# Altium PCB ART23275-9 REV-A.PcbDoc
Units mm, origin at the board's own origin, x right, y up, seen from the top; angles counter-clockwise.
Board outline 26 x 26 mm, 2 copper layers (Top Layer, Bottom Layer); 45 components, 27 nets, 103 pads, 33 vias.
Unrouted connection lines stored in the file: 1.
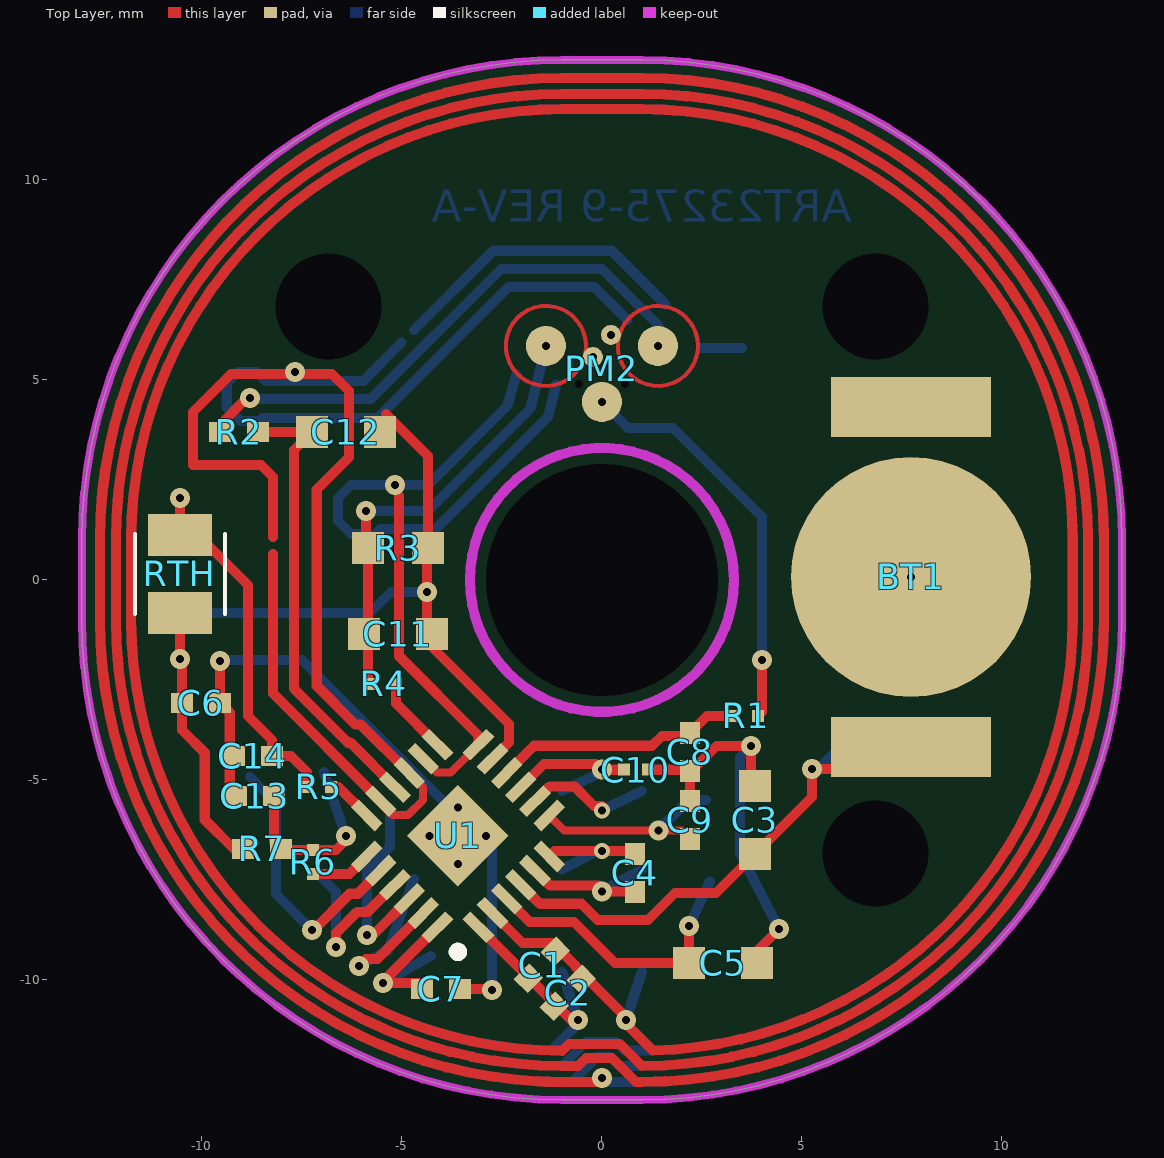
[diagram p0: Top Layer view]
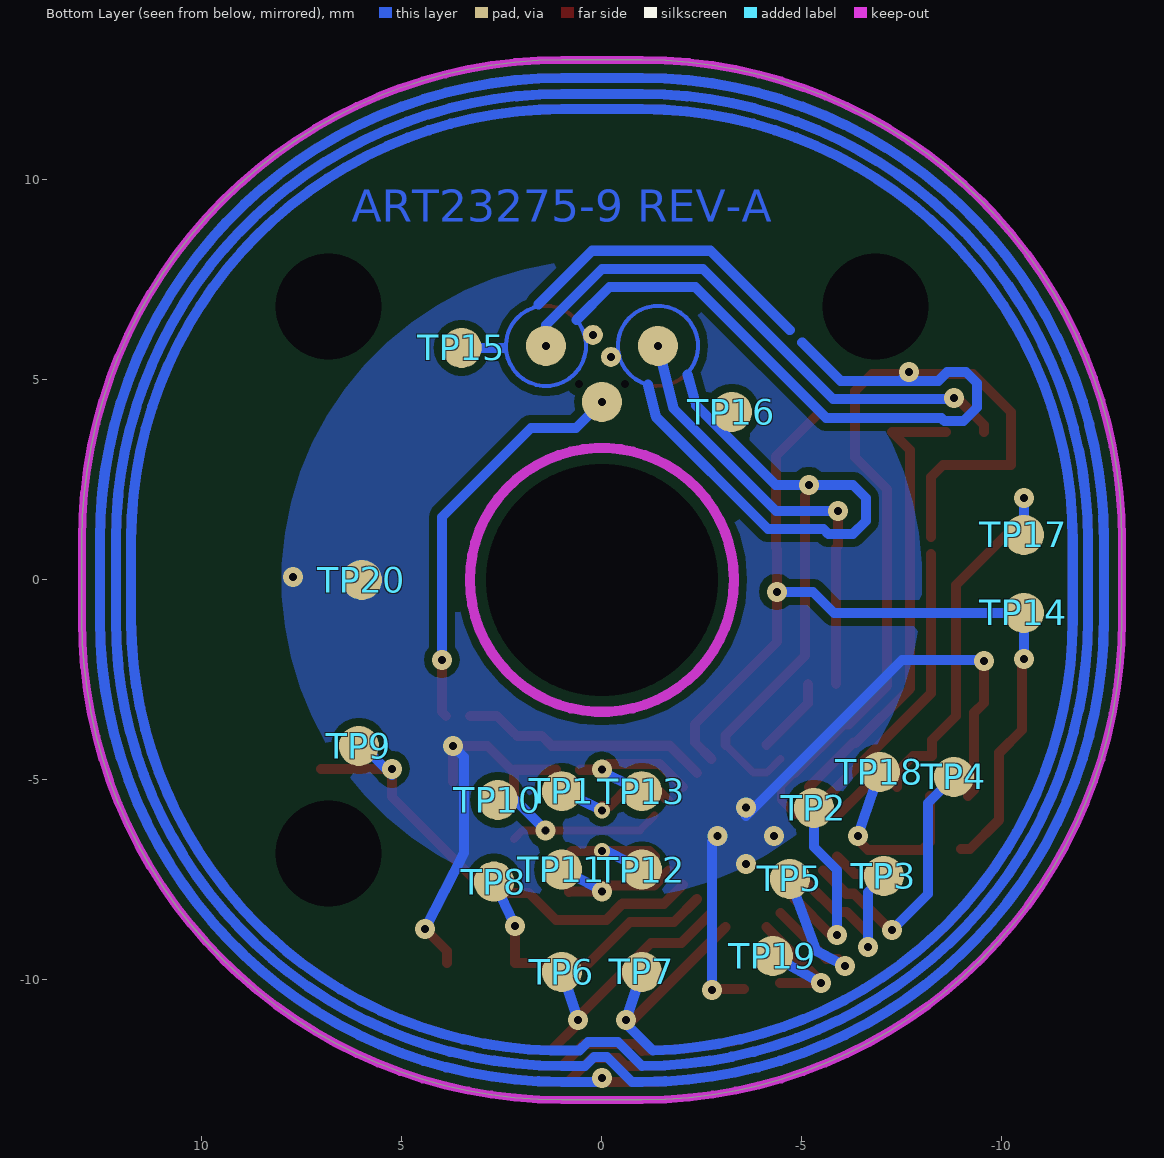
[diagram p1: Bottom Layer view, seen from below]
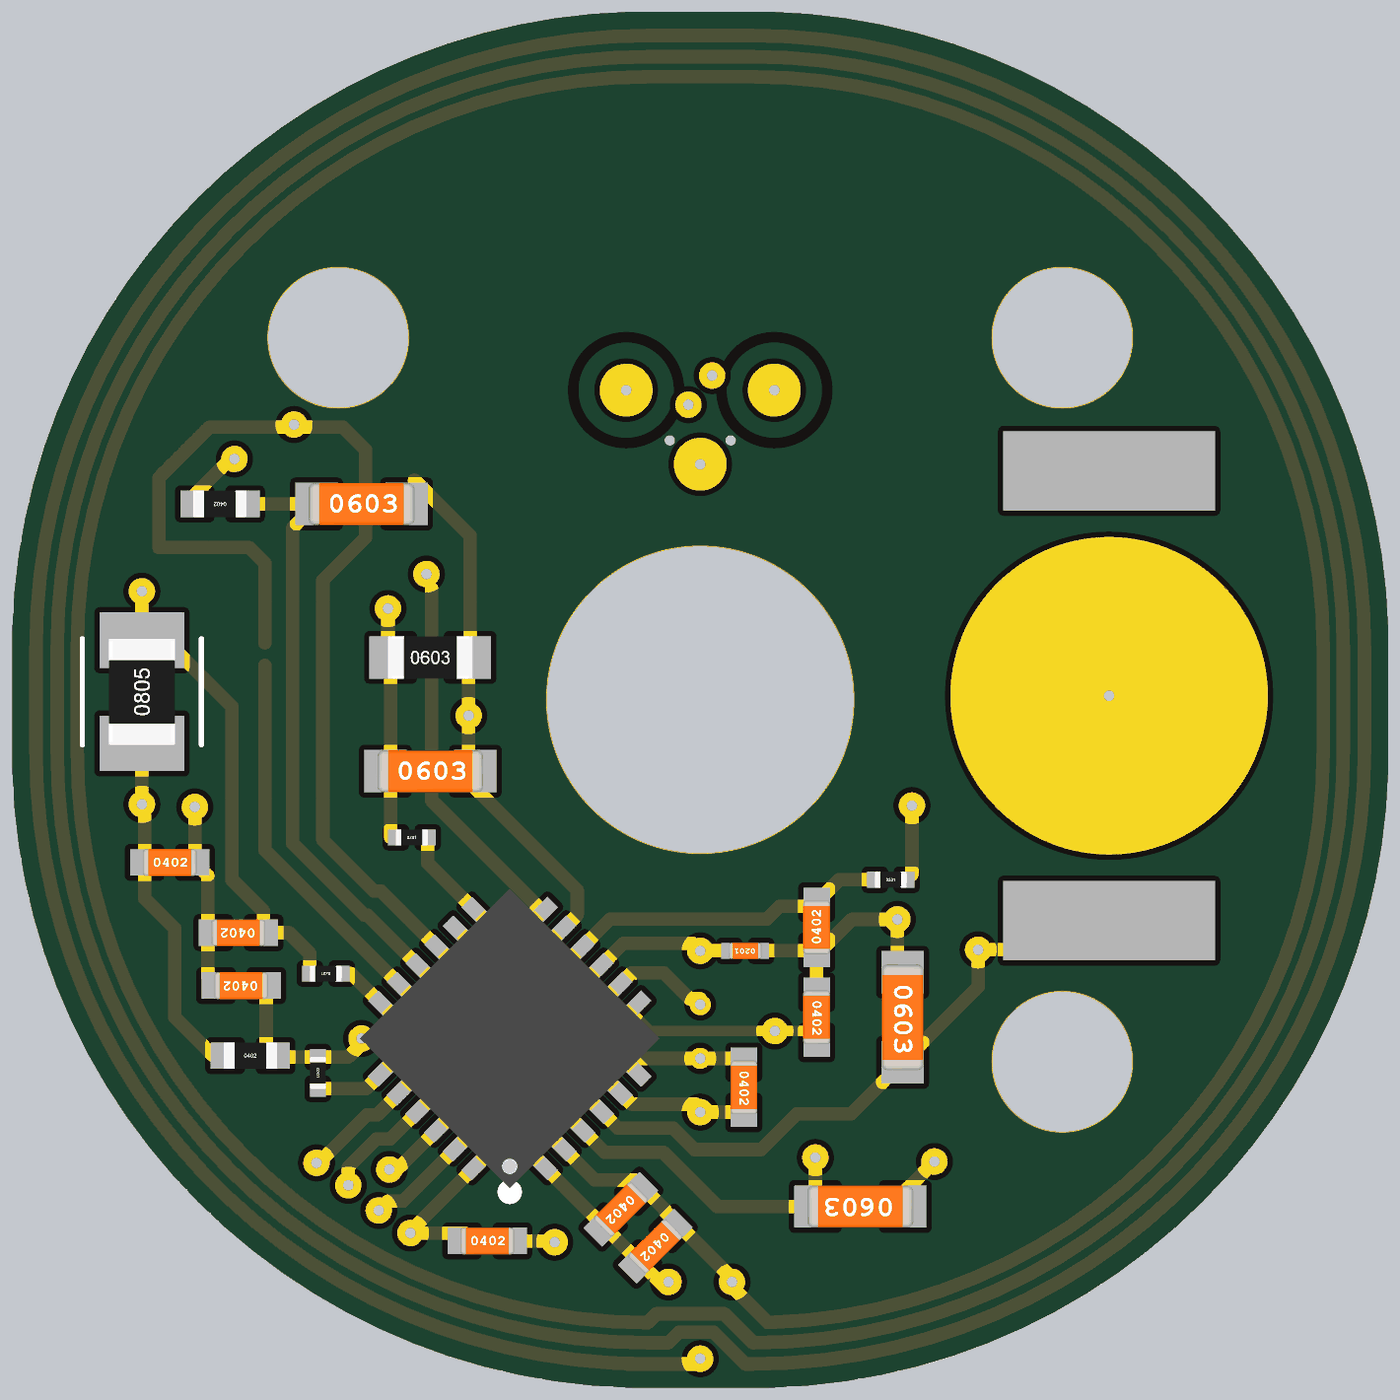
[diagram p2: 3D render of the assembled board from above, using the file's embedded part models]

## Layer stack, top to bottom
Top Solder: solder mask 0.0102, Solder Resist, Dk 3.5
Top Layer: signal copper 0.0356
Dielectric 1: dielectric 0.32, FR-4, Dk 4.8
Bottom Layer: signal copper 0.0356
Bottom Solder: solder mask 0.0102, Solder Resist, Dk 3.5

## Board outline
-13,-1 ccw(c-1,-1) -1,-13 1,-13 ccw(c1,-1) 13,-1 13,1 ccw(c1,1) 1,13 -1,13 ccw(c-1,1) -13,1

## Design rules (kind name [scope] priority, off if disabled: settings)
Clearance [All] p1: gap=0.2
DiffPairsRouting [All] p1: maxlimit=0.254 minlimit=0.2 mostfreqgap=0.254 toplayer_minwidth=0.1 toplayer_maxwidth=0.381 toplayer_prefwidth=0.381 bottomlayer_minwidth=0.1 bottomlayer_maxwidth=0.381 bottomlayer_prefwidth=0.381 maxuncoupledlength=12.7
PlaneConnect [All] p1: planeconnectstyle=Direct reliefexpansion=0.508 reliefentries=4 reliefconductorwidth=0.254 reliefairgap=0.254
PolygonConnect [All] p1: connectstyle=Direct reliefconductorwidth=0.254 reliefentries=4 polygonreliefangle="90 Angle" airgapwidth=0.254
RoutingVias [All] p1: holewidth=0.711 width=1.27 viastyle="Through Hole" minholewidth=0.1 minwidth=0.2 maxholewidth=0.711 maxwidth=1.27
SolderMaskExpansion [All] p1: expansion=0.102
Width [All] p1: maxlimit=0.254 minlimit=0.1 preferedwidth=0.254
28 further rules are at their usual default settings.

## Components (designator, comment, footprint, x,y, rotation, side; value= is the part's Value field where it differs from the comment)
BT1 "Bateria" "BAT - V377" 9.6,3.6 r0 top
C1 "Cap.Cer. 100pF/50V SMD" "CAP 0402 - micro" -1.5,-9.625 r225 top
C2 "Cap.Cer. 100pF/50V SMD" "CAP 0402 - micro" -0.85,-10.325 r225 top
C3 "Cap.Cer. 3uF/50V SMD" "CAP 0603 - micro" 3.825,-6 r270 top
C4 "Cap.Cer. 10nF/50V SMD" "CAP 0402 - micro" 0.825,-7.325 r270 top
C5 "Cap.Cer. 17uF/50V SMD" "CAP 0603 - micro" 3.025,-9.575 r180 top
C6 "Cap.Cer. 100nF/50V SMD" "CAP 0402 - micro" -10.025,-3.075 r0 top
C7 "Cap.Cer. 100pF/50V SMD" "CAP 0402 - micro" -4.025,-10.225 r0 top
C8 "Cap.Cer. 100pF/50V SMD" "CAP 0402 - micro" 2.2,-4.3 r90 top
C9 "Cap.Cer. 1uF/50V SMD" "CAP 0402 - micro" 2.2,-6 r270 top
C10 "Cap.Cer. 10nF/50V SMD" "CAP 0201 - micro" 0.85,-4.744 r180 top
C11 "Cap.Cer. 368nF/50V SMD" "CAP 0603 - micro" -5.1,-1.35 r0 top
C12 "Cap.Cer. 100pF/50V SMD" "CAP 0603 - micro" -6.4,3.7 r0 top
C13 "Cap.Cer. 100pF/50V SMD" "CAP 0402 - micro" -8.675,-5.4 r180 top
C14 "Cap.Cer. 100pF/50V SMD" "CAP 0402 - micro" -8.725,-4.4 r180 top
PM2 "Sensor Libre" Libre_sensor 0,4.45 r0 top
R1 "Res 10K SMD" "RES 0201 - micro" 3.6,-3.4 r0 top
R2 "Res 100K SMD" "RES 0402 - micro" -9.075,3.7 r180 top
R3 "Res 1.5M SMD" "RES 0603 - micro" -5.1,0.8 r0 top
R4 "Res 10K SMD" "RES 0201 - micro" -5.45,-2.6 r0 top
R5 "Res 1K SMD" "RES 0201 - micro" -7.075,-5.175 r180 top
R6 "Res 1K SMD" "RES 0201 - micro" -7.225,-7.05 r270 top
R7 "Res 71K SMD" "RES 0402 - micro" -8.5,-6.725 r0 top
RTH "Thermistor NTC" "res 0805" -10.55,0.15 r90 top
TP1 "Teste Point" TestePoit_1mm 1,-5.28 r90 bottom
TP2 "Teste Point" TestePoit_1mm -5.3,-5.7 r90 bottom
TP3 "Teste Point" TestePoit_1mm -7.05,-7.4 r90 bottom
TP4 "Teste Point" TestePoit_1mm -8.8,-4.925 r90 bottom
TP5 "Teste Point" TestePoit_1mm -4.7,-7.475 r90 bottom
TP6 "Teste Point" TestePoit_1mm 1,-9.8 r90 bottom
TP7 "Teste Point" TestePoit_1mm -1,-9.8 r90 bottom
TP8 "Teste Point" TestePoit_1mm 2.698,-7.541 r90 bottom
TP9 "Teste Point" TestePoit_1mm 6.075,-4.15 r90 bottom
TP10 "Teste Point" TestePoit_1mm 2.6,-5.5 r90 bottom
TP11 "Teste Point" TestePoit_1mm 1,-7.24 r90 bottom
TP12 "Teste Point" TestePoit_1mm -1,-7.24 r90 bottom
TP13 "Teste Point" TestePoit_1mm -1,-5.28 r90 bottom
TP14 "Teste Point" TestePoit_1mm -10.55,-0.825 r270 bottom
TP15 "Teste Point" TestePoit_1mm 3.506,5.8 r90 bottom
TP16 "Teste Point" TestePoit_1mm -3.25,4.2 r90 bottom
TP17 "Teste Point" TestePoit_1mm -10.55,1.125 r270 bottom
TP18 "Teste Point" TestePoit_1mm -6.95,-4.8 r90 bottom
TP19 "Teste Point" TestePoit_1mm -4.275,-9.4 r90 bottom
TP20 "Teste Point" TestePoit_1mm 6,0 r90 bottom
U1 "RF430FRL152H" "VQFN 24" -3.6,-6.4 r135 top

## Footprints (in the part's own frame and the unit in brackets; to place one, negate y for a bottom-side part, rotate by r counter-clockwise, add the part's x,y. Pads: shape width x height; smd on the part's side, far side on the other; paste and mask are expansions set on the pad)
"BAT - V377" [mm]
  rect 4x1.5 smd: 1(-1.875,-7.775) 1(-1.875,0.725)
  round 6 / inner round 15 / far side round 0 all layers, no hole: 2(-1.875,-3.525)
  body extent -5.28,-8.49 1.53,1.44, height 3
"CAP 0201 - micro" [mm] "Generic Capacitor - Basic SMD 0201(0603 Metric)"
  rect 0.3x0.3 smd: 1(-0.3,0) 2(0.3,0)
  body extent -0.31,-0.15 0.3,0.15, height 0.31
"CAP 0402 - micro" [mm] "Generic Capacitor - Basic SMD 0402 (1005 Metric)"
  rect 0.55x0.5 smd: 1(-0.475,0) 2(0.475,0)
  body extent -0.51,-0.25 0.51,0.25, height 0.51
"CAP 0603 - micro" [mm] "Generic Capacitor - Basic SMD 0603 (1608 Metric)"
  rect 0.8x0.8 smd: 1(-0.85,0) 2(0.85,0)
  body extent -1,-0.39 1,0.39, height 0.79
Libre_sensor [mm]
  round 1 hole 0.2: 1(0,0) 2(-1.4,1.4) 3(1.4,1.4)
  round 0.5 hole 0.2: 4(-0.225,1.125) 5(0.225,1.675)
  round 0 hole 0.2 unplated: ""(-0.575,0.45) ""(0.575,0.45)
  Top Layer circle w0.1: c1.4,1.4 r1
  Top Layer circle w0.1: c-1.4,1.4 r1
"RES 0201 - micro" [mm] "Generic Resistor - Basic SMD 0201 (0603 Metric)"
  rect 0.3x0.3 smd: 1(-0.3,0) 2(0.3,0)
  body extent -0.3,-0.15 0.3,0.15, height 0.22
"RES 0402 - micro" [mm] "Generic Resistor - Basic SMD 0402 (0805 Metric)"
  rect 0.55x0.5 smd: 1(-0.475,0) 2(0.475,0)
  body extent -0.5,-0.25 0.5,0.25, height 0.33
"RES 0603 - micro" [mm] "Generic Resistor - Basic SMD 0603 (1608 Metric)"
  rect 0.8x0.8 smd: 1(-0.75,0) 2(0.75,0)
  body extent -0.8,-0.4 0.8,0.4, height 0.44
"res 0805" [mm] "Generic Resistor - Basic SMD 0805 (2012 Metric)"
  rect 1.05x1.6 smd: 1(-0.975,0) 2(0.975,0)
  silkscreen extent -1,-1.12 1,1.13, body extent -1,-0.62 1,0.62, height 0.59
TestePoit_1mm [mm]
  round 1 smd: 1(0,0)
"VQFN 24" [mm]
  rect 1.8x1.8 smd: 0(0,0)
  rect 0.85x0.28 smd: 1(-1.975,1.25) 2(-1.975,0.75) 3(-1.975,0.25) 4(-1.975,-0.25) 5(-1.975,-0.75) 6(-1.975,-1.25) 13(1.975,-1.25) 14(1.975,-0.75) 15(1.975,-0.25) 16(1.975,0.25) 17(1.975,0.75) 18(1.975,1.25)
  rect 0.28x0.85 smd: 7(-1.25,-1.975) 8(-0.75,-1.975) 9(-0.25,-1.975) 10(0.25,-1.975) 11(0.75,-1.975) 12(1.25,-1.975) 19(1.25,1.975) 20(0.75,1.975) 21(0.25,1.975) 22(-0.25,1.975) 23(-0.75,1.975) 24(-1.25,1.975)
  silkscreen extent -2.15,1.95 -1.95,2.15, body extent -2.05,-2.05 2.05,2.05, height 1

## Part data
BT1: library part "Soquete Bat", "Suporte para bateria"
C1 C2 C7 C8 C12 C13 C14: library part "Cap.Cer. 150pF/50V SMD", "Capacitor Cerâmico"
C3 C5: library part "Cap.Cer. 1uF/50V SMD", "Capacitor Cerâmico"
C4 C6 C9 C10: "Capacitor Cerâmico"
C11: library part "Cap.Cer. 100nF/50V SMD", "Capacitor Cerâmico"
R1 R2 R4 R5 R6: "Resistor"
R3: library part "Res 2M SMD", "Resistor"
R7: library part "Res 68K SMD", "Resistor"
RTH: "Thermistor"
U1: "NFC ISO15693 Sensor Transponder With SPI/I2C Interface and 14-Bit Sigma-Delta ADC"

## Free pads (board coordinates)
  round 0 hole 2.65: ""(-6.84,6.84) ""(6.84,-6.84) ""(6.84,6.84)
  round 0 hole 5.8: ""(0,0)

## Via types
v1: diameter 0.5, hole 0.2, Top Layer to Bottom Layer, 31 vias
v2: diameter 0.4, hole 0.2, Top Layer to Bottom Layer, 2 vias

## Nets (pads, with @x,y where several pads share a name; then routed paths per layer and width w, separated by ;. In a path a pad name is that pad's centre, name@x,y a point inside that pad or via, vN(x,y) a via of type N, cw(c..) or ccw(c..) an arc to the next point about the centre after c; other vN are vias at no path point)
GND: BT1.2 C3.1 C5.1 C6.2 C7.2 C8.1 C9.1 C10.1 C13.2 C14.2 TP20.1 U1.0 | length 26.3
  Top Layer w0.254: v1(-9.55,-2.025) C6.2 -9.304,-3.321 -9.304,-5.246 C13.2 ; C7.2 -2.775,-10.225 v1(-2.75,-10.25) ; C10.1 C8.1@2.169,-4.744 ; C9.1 C8.1 ; C8.1 2.237,-4.775 2.862,-4.15 v1(3.725,-4.15) C3.1@3.725,-5.05 ; C5.1 3.875,-9.275 v1(4.425,-8.725)
  Bottom Layer w0.254: v1(-9.55,-2.025) -9.525,-2 -7.5,-2 v1@-3.6,-5.9 ; v1(-2.893,-6.4) -2.75,-6.543 v1(-2.75,-10.25) ; v1(3.725,-4.15) 3.45,-4.425 3.45,-6.825 v1(4.425,-8.725)
  other v1: -3.6,-7.107 -4.307,-6.4 -3.6,-5.693 7.725,0.075
NetBT1_1: BT1.1 C3.2 TP9.1 U1.4 | length 12.5
  Top Layer w0.254: U1.4 -1.55,-8.096 -0.512,-8.096 -0.108,-8.5 1.15,-8.5 1.825,-7.825 2.85,-7.825 C3.2 5.25,-5.425 v1(5.25,-4.725) BT1.1@7.025,-4.725
  Bottom Layer w0.254: v1@5.25,-4.875 5.975,-4.15 TP9.1
NetC1_1: C1.1 C1.2 C2.1 C2.2 TP6.1 TP7.1 U1.1 U1.2 | length 480.2
  Top Layer w0.254: U1.1 v1@-0.684,-11.084 ; U1.2 -1.986,-9.075 -1.228,-9.075 -0.664,-9.639 -0.664,-9.664 v1@0.636,-10.964 ; -1.395,-12.55 v1@-0.075,-12.55 ; -1,-12.55 cw(c-1,-1) -12.55,-1 -12.55,1 cw(c-1,1) -1,12.55 1,12.55 cw(c1,1) 12.55,1 12.55,-1 cw(c1,-1) 1,-12.55 0.85,-12.55 0.25,-11.95 -0.4,-11.95 -0.6,-12.15 -0.975,-12.15 ; -1,-12.15 cw(c-1,-1) -12.15,-1 -12.15,1 cw(c-1,1) -1,12.15 1,12.15 cw(c1,1) 12.15,1 12.15,-1 cw(c1,-1) 1,-12.15 0.45,-11.6 -0.825,-11.6 -1,-11.775 ; -1,-11.77 cw(c-1,-1) -11.77,-1 -11.77,1 cw(c-1,1) -1,11.77 1,11.77 cw(c1,1) 11.77,1 11.77,-1 cw(c1,-1) 1.275,-11.766 0.6,-11.092 v1(0.6,-11)
  Bottom Layer w0.254: TP7.1 v1(-0.6,-11) -0.6,-11.092 -1.275,-11.766 cw(c-1,-1) -11.77,-1 -11.77,1 cw(c-1,1) -1,11.77 1,11.77 cw(c1,1) 11.77,1 11.77,-1 cw(c1,-1) 1.275,-11.766 0.566,-11.766 0.35,-11.55 -0.4,-11.55 -1,-12.15 cw(c-1,-1) -12.15,-1 -12.15,1 cw(c-1,1) -1,12.15 1,12.15 cw(c1,1) 12.15,1 12.15,-1 cw(c1,-1) 1,-12.15 0.425,-12.15 0.2,-11.925 -0.125,-11.925 -0.75,-12.55 -1,-12.55 cw(c-1,-1) -12.55,-1 -12.55,1 cw(c-1,1) -1,12.55 1,12.55 cw(c1,1) 12.55,1 12.55,-1 cw(c1,-1) 1,-12.55 v1@-0.075,-12.55 ; v1(0.6,-11) TP6.1
  other v1: 0,-12.45
NetC4_1: C4.1 TP12.1 U1.6 | length 3.4
  Top Layer w0.254: U1.6 -1.183,-6.776 v2(0,-6.776) 0.751,-6.776 C4.1
  Bottom Layer w0.254: TP12.1 -0.023,-6.732 v2@0,-6.72
NetC4_2: C4.2 TP11.1 U1.5 | length 3.8
  Top Layer w0.254: U1.5 -1.297,-7.642 -0.083,-7.642 v1@0,-7.725 ; v1(0,-7.792) 0.817,-7.792 C4.2
  Bottom Layer w0.254: v1@0,-7.76 TP11.1
NetC5_2: C5.2 TP8.1 U1.3 | length 7.4
  Top Layer w0.254: U1.3 -1.804,-8.55 -0.7,-8.55 0.325,-9.575 C5.2 v1(2.175,-8.65)
  Bottom Layer w0.254: v1(2.175,-8.65) TP8.1
NetC6_1: C6.1 C11.2 C12.2 R3.2 R7.1 RTH.1 TP14.1 U1.11 | length 24.3
  Top Layer w0.254: RTH.1 v1(-10.55,-1.975) -10.5,-2.025 C6.1 -10.5,-3.75 -9.931,-4.319 -9.931,-5.994 -9.2,-6.725 R7.1 ; -5.4,4.15 -4.35,3.1 R3.2 ; R3.2@-4.375,0.775 v1(-4.375,-0.3) -4.375,-1.55 -2.325,-3.6 -2.325,-4.064 U1.11
  Bottom Layer w0.254: v1(-10.55,-1.975) TP14.1 -5.8,-0.825 -5.275,-0.3 v1(-4.375,-0.3)
NetC7_1: C7.1 TP19.1 U1.24 | length 4.4
  Top Layer w0.254: v1@-5.491,-10.059 U1.24 ; v1(-5.475,-10.075) C7.1@-4.45,-10.075
  Bottom Layer w0.254: v1(-5.475,-10.075) TP19.1
NetC9_2: C9.2 TP10.1 U1.7 | length 5.3
  Top Layer w0.2: U1.7 -0.947,-6.26 v1(1.41,-6.26) 1.985,-6.26 C9.2
  Bottom Layer w0.254: v1(1.41,-6.26) 2.17,-5.5 TP10.1
NetC10_2: C10.2 TP13.1 U1.9 | length 4
  Top Layer w0.254: U1.9 -1.446,-4.6 -0.15,-4.6 v1@0,-4.75 ; v1(0,-4.744) C10.2
  Bottom Layer w0.254: TP13.1 v1@0,-4.8
NetC11_1: C11.1 PM2.2 R3.1 R4.1 | length 11.1
  Top Layer w0.254: v1(-5.9,1.725) -5.9,0.85 R3.1 R4.1@-5.85,-2.6
  Bottom Layer w0.254: v1(-5.9,1.725) -4.35,1.725 -1.788,4.287 PM2.2
NetC13_1: C13.1 R6.1 R7.2 TP18.1 | length 4.9
  Top Layer w0.254: C13.1 -8.2,-6.55 R7.2 ; R7.2@-8,-6.75 R6.1 -6.65,-6.75 v1@-6.35,-6.45
  Bottom Layer w0.254: TP18.1 v1(-6.4,-6.4)
NetC14_1: C14.1 R5.2 RTH.2 TP17.1 | length 9.7
  Top Layer w0.254: v1(-10.55,2.05) -10.55,1.575 -8.85,-0.125 -8.85,-3.4 -8.25,-4 C14.1 -7.775,-4.4 -7.375,-4.8 R5.2
  Bottom Layer w0.254: TP17.1 v1(-10.55,2.05)
NetPM2_1: PM2.1 R1.2 | length 10.2
  Top Layer w0.254: R1.2 4,-3.3 v1(4,-2)
  Bottom Layer w0.254: PM2.1 0.65,3.8 1.775,3.8 4,1.575 v1(4,-2)
NetPM2_3: PM2.3 R2.2 | length 13.9
  Top Layer w0.254: R2.2 -9.55,3.875 -8.875,4.55 v1(-8.8,4.55)
  Bottom Layer w0.254: v1(-8.8,4.55) -8.771,4.521 -5.779,4.521 -2.525,7.775 0,7.775 1.4,6.375 PM2.3
NetR5_1: R5.1 U1.18 | length 1.2
  Top Layer w0.254: R5.1 -6.593,-5.175 U1.18
NetR6_2: R6.2 U1.19 | length 1.5
  Top Layer w0.254: R6.2 -6.318,-7.35 U1.19
NetTP1_1: TP1.1 U1.8 | length 3.1
  Top Layer w0.254: U1.8 -1.3,-5.161 -0.689,-5.161 -0.2,-5.65 v2@0,-5.65
  Bottom Layer w0.254: v2(0,-5.76) TP1.1
NetTP2_1: TP2.1 U1.22 | length 4.9
  Top Layer w0.254: v1(-5.875,-8.875) -5.722,-8.875 U1.22
  Bottom Layer w0.254: v1@-5.875,-8.971 v1(-5.875,-8.875) -5.875,-7.25 -5.3,-6.675 TP2.1
NetTP3_1: TP3.1 U1.21 | length 4.3
  Top Layer w0.254: v1(-6.65,-9.175) -6.65,-8.834 -6.114,-8.298 -5.852,-8.298 U1.21
  Bottom Layer w0.254: TP3.1 -6.65,-7.8 v1(-6.65,-9.175)
NetTP4_1: TP4.1 U1.20 | length 6.8
  Top Layer w0.254: v1(-7.25,-8.75) -7.208,-8.75 -6.302,-7.844 -6.105,-7.844 U1.20
  Bottom Layer w0.254: TP4.1 -8.15,-5.575 -8.15,-7.851 v1(-7.25,-8.75) v1@-7.275,-8.775
NetTP5_1: TP5.1 U1.23 | length 4.9
  Top Layer w0.254: v1(-6.075,-9.65) -5.9,-9.475 -5.614,-9.475 U1.23
  Bottom Layer w0.254: v1(-6.075,-9.65) -5.354,-9.271 TP5.1
REF: C8.2 R1.1 U1.10 | length 6.2
  Top Layer w0.254: U1.10 -1.7,-4.146 1.254,-4.146 1.5,-3.9 C8.2@2.125,-3.9 ; C8.2 2.625,-3.4 R1.1
"SENSOR 1": R4.2 U1.13 | length 1.9
  Top Layer w0.254: R4.2 -5.15,-3.082 U1.13
"SENSOR 2": C12.1 R2.1 U1.16 | length 11.5
  Top Layer w0.254: R2.1 C12.1 -7.7,3.25 -7.7,-2.719 -6.348,-4.071 -6.283,-4.071 U1.16
"SHIELD 1": PM2.4 TP16.1 U1.12 U1.14 | length 28.1
  Top Layer w0.2: U1.14 -4.12,-4.819 -3.787,-4.819 U1.12
  Top Layer w0.254: -5.075,2.1 -5.075,1.529 -5.077,1.527 -5.077,-1.898 -3.087,-3.888 U1.12
  Bottom Layer w0.1: -2.123,5.155 cw(c-1.4,5.85) -1.15,4.879
  Bottom Layer w0.254: -2.139,5.139 -2.358,4.359 -4.342,2.375 v1(-5.175,2.375) -6.275,2.375 -6.6,2.05 -6.6,1.475 -6.273,1.148 -5.661,1.148 -5.538,1.271 -4.154,1.271 -1.348,4.077 -1.151,4.879
"SHIELD 2": PM2.5 TP15.1 U1.15 U1.17 | length 61.7
  Top Layer w0.2: U1.17 -5.47,-5.534 -5.47,-5.647 -5.237,-5.88 -4.848,-5.88 -4.474,-5.506 -4.474,-5.173 U1.15
  Top Layer w0.254: -8.225,0.65 -8.225,-2.836 U1.17 ; -8.225,1.075 -8.225,2.575 -8.525,2.875 -10.225,2.875 -10.225,4.2 -9.275,5.15 -6.75,5.15 -6.325,4.725 -6.325,3.067 -7.131,2.261 -7.131,-2.646 -6.16,-3.617 -6.029,-3.617 U1.15
  Bottom Layer w0.1: 0.678,6.546 ccw(c1.4,5.85) 1.539,6.843
  Bottom Layer w0.254: v1(-7.675,5.2) -7.45,4.975 ; -5.009,5.934 -5.967,4.975 -7.45,4.975 ; -4.696,6.246 -2.713,8.229 0.246,8.229 1.585,6.89 ; 0.632,6.5 -0.188,7.321 -2.337,7.321 -5.608,4.05 -8.485,4.05 -8.561,3.973 -9.039,3.973 -9.377,4.311 -9.377,4.923 -9.1,5.2 -8.634,5.2 -8.409,4.975 -7.45,4.975 ; 2.475,5.8 TP15.1
pads on no net: PM2.

## Polygon pours and split planes (outlines as drawn)
GND on Bottom Layer "Top Layer-No Net" (solid, remove dead copper, pour order 0): 0,8 cw(c0,0) 8,0 cw(c0,0) 0,-8 cw(c0,0) -8,0 cw(c0,0)

## Keep-outs
Keep-Out Layer:
  circle w0.254: c0,0 r3.3
  lines w0.2: -13,-1 ccw(c-1,-1) -1,-13 1,-13 ccw(c1,-1) 13,-1 13,1 ccw(c1,1) 1,13 -1,13 ccw(c-1,1) -13,1 -13,-1

## Other copper
Bottom Layer:
  text "ART23275-9 REV-A" at 6.25,8.95 h0.8

## Dimensions
1,13 to 1,-13 on Mechanical 1
-13,1 to 13,1 on Mechanical 1